# Altium PCB BURPG_accelerometer_v1.PcbDoc
Units mil, origin at the board's own origin, x right, y up, seen from the top; angles counter-clockwise.
Board outline 800 x 750 mil, 2 copper layers (Top Layer, Bottom Layer); 9 components, 8 nets, 39 pads, 7 vias.
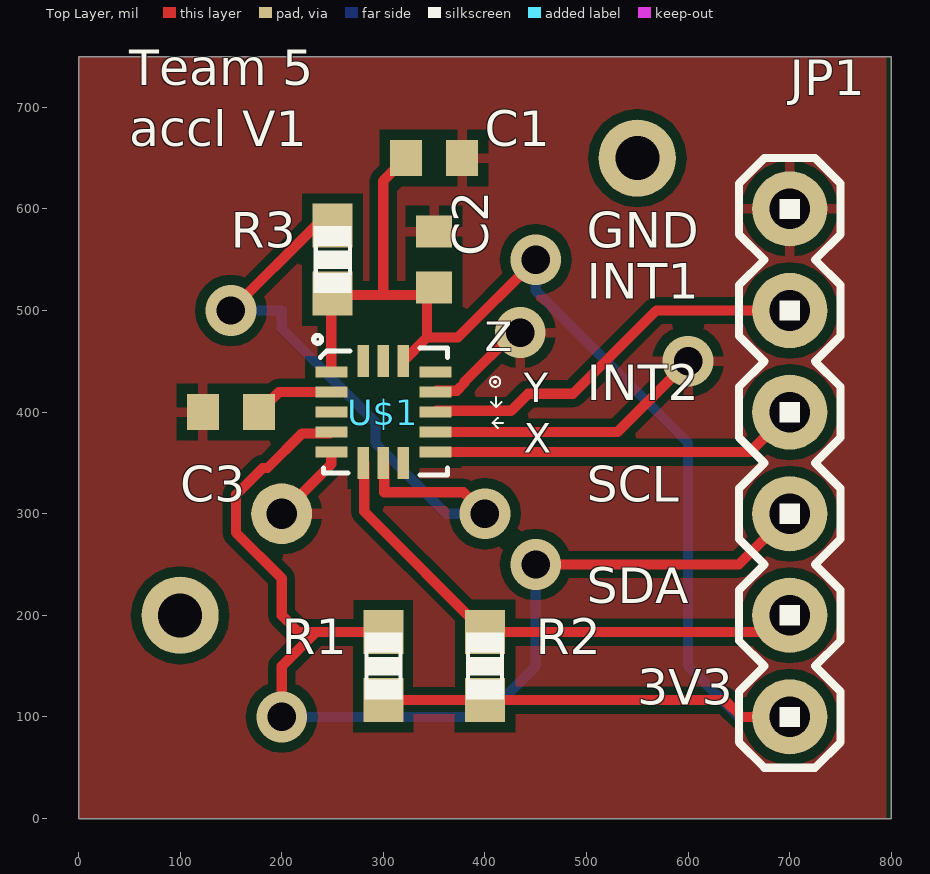
[diagram p0: Top Layer view]
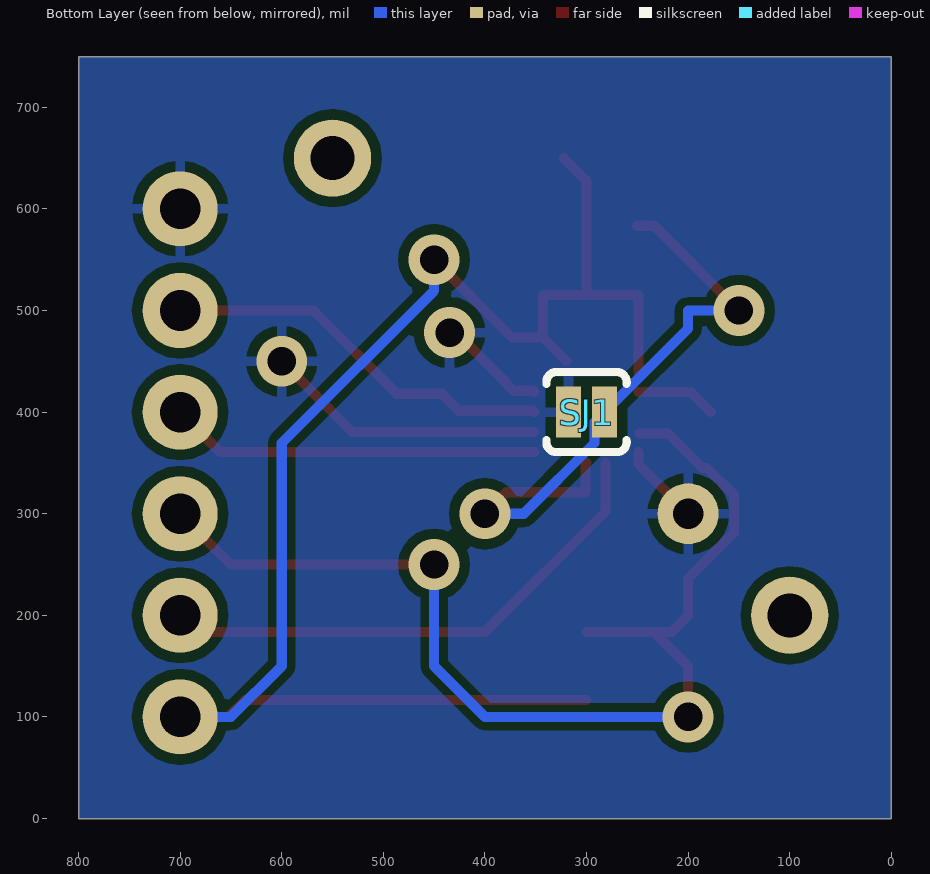
[diagram p1: Bottom Layer view, seen from below]

## Layer stack, top to bottom
Top Solder: solder mask 0.4, Solder Resist, Dk 3.5
Top Layer: signal copper 1.4
Dielectric 1: dielectric 12.6, FR-4, Dk 4.8
Bottom Layer: signal copper 1.4
Bottom Solder: solder mask 0.4, Solder Resist, Dk 3.5

## Board outline
0,0 0,750 800,750 800,0

## Design rules (kind name [scope] priority, off if disabled: settings)
Clearance [All] p1: gap=10 except(8: Track-Track Track-SMDPad Track-Poly SMDPad-SMDPad)
MinimumSolderMaskSliver [All] p1 off: minsoldermaskwidth=10
PolygonConnect [All] p1: connectstyle=Relief reliefconductorwidth=10 reliefentries=4 polygonreliefangle="90 Angle" airgapwidth=10
RoomDefinition BURPG_accelerometer_v1 [InComponentClass('BURPG_accelerometer_v1')] p1: confinementstyle=ConfineIn formatcopy=TRUE lockcomponents=FALSE outline 15,0 795,0 795,750 15,750
RoutingVias [All] p1: holewidth=28 width=50 viastyle="Through Hole" minholewidth=28 minwidth=50 maxholewidth=28 maxwidth=50
SilkToSilkClearance [All] p1 off: silktosilkclearance=10
SilkToSolderMaskClearance [IsPad] p1 off: minsilkscreentomaskgap=10 clearancetoexposedcopper=TRUE
SolderMaskExpansion [All] p1: expansion=4
Width [All] p1: maxlimit=10 minlimit=10 preferedwidth=10
27 further rules are at their usual default settings.

## Components (designator, comment, footprint, x,y, rotation, side; value= is the part's Value field where it differs from the comment)
C1 "Cap Semi" 1608[0603] 350,650 r180 top
C2 "Cap Semi" 1608[0603] 350,550 r270 top
C3 "Cap Semi" 1608[0603] 150,400 r0 top
JP1 "M06SIP" 1X06 700,100 r90 top
R1 "*" 0603-RES 300,150 r270 top
R2 "10k" 0603-RES 400,150 r270 top
R3 "10k" 0603-RES 250,550 r270 top
SJ1 "SOLDERJUMPERNO" SJ_2S-NO 300,400 r180 bottom
U$1 "ZEDIT_MMA8452Q" ZEDIT_MMASENSOR 300,400 r0 top

## Footprints (in the part's own frame and the unit in brackets; to place one, negate y for a bottom-side part, rotate by r counter-clockwise, add the part's x,y. Pads: shape width x height; smd on the part's side, far side on the other; paste and mask are expansions set on the pad)
1X06 [mil]
  round 74 hole 40: 1(0,0) 2(100,0) 3(200,0) 4(300,0) 5(400,0) 6(500,0)
  silkscreen extent -50,-50 550,50
0603-RES [mm]
  rect 1.1x1 smd: 1(-0.85,0) 2(0.85,0)
  silkscreen extent -0.84,-0.47 0.83,0.48
1608[0603] [mm] "Chip Capacitor, Body 1.6x0.8mm, IPC High Density"
  rect 0.8x0.9 smd: 1(-0.7,0) 2(0.7,0)
  body extent -0.87,-0.48 0.87,0.48, height 1.3
SJ_2S-NO [mm]
  rect 0.635x1.27 smd: 1(-0.45,0) 2(0.45,0)
  silkscreen extent -1,-1 1,1
ZEDIT_MMASENSOR [mm]
  rect 0.8x0.275 smd: 1(-1.3,1) 2(-1.3,0.5) 3(-1.3,0) 4(-1.3,-0.5) 5(-1.3,-1) 9(1.3,-1) 10(1.3,-0.5) 11(1.3,0) 12(1.3,0.5) 13(1.3,1)
  rect 0.29x0.8 smd: 6(-0.5,-1.275) 7(0,-1.275) 8(0.5,-1.275) 14(0.5,1.275) 15(0,1.275) 16(-0.5,1.275)
  silkscreen extent -1.74,-1.57 2.99,1.92

## Part data
C1 C2 C3: "Capacitor (Semiconductor SIM Model)"
R1 R2 R3: library part 10K-1%RES-00824

## Free pads (board coordinates)
  round 60 hole 30: 3(200,300)
  round 76 hole 43.42 mask+20: 4(100,200) 4(550,650)

## Via types
v1: diameter 50, hole 28, Top Layer to Bottom Layer, 7 vias

## Nets (pads, with @x,y where several pads share a name; then routed paths per layer and width w, separated by ;. In a path a pad name is that pad's centre, name@x,y a point inside that pad or via, vN(x,y) a via of type N, cw(c..) or ccw(c..) an arc to the next point about the centre after c; other vN are vias at no path point)
3.3V: C1.2 C2.2 JP1.1 R1.2 R2.2 R3.2 U$1.1 U$1.14 | length 1517.3
  Top Layer w10: U$1.1 248.8,515.34 300,515.34 ; R1.2 R2.2 636.05,116.54 652.59,100 JP1.1 ; U$1.14 342.9,473.41 ; C1.2 300,627.56 300,515.34 ; v1(450,550) 373.41,473.41 342.9,473.41 ; 300,515.34 342.9,515.34 342.9,473.41
  Bottom Layer w10: v1(450,550) 450,519.6 600,369.6 600,150 650,100 JP1.1
GND: C1.1 C2.1 C3.1 JP1.6 pad.3 SJ1.1 U$1.5 U$1.10 U$1.12 | length 467.2
  Top Layer w10: pad.3 248.8,348.8 U$1.5 ; U$1.10 530.32,380.32 v1(600,450) ; U$1.12 352.48,420.96 372.33,420.96 379.95,428.58 379.95,429.95 428.23,478.23 v1(434.8,478.23)
INT1: JP1.5 U$1.11 | length 390.2
  Top Layer w10: U$1.11 352.48,401.28 425.82,401.28 442.54,418 486.74,418 568.74,500 JP1.5
INT2: JP1.4 U$1.9 | length 365.1
  Top Layer w10: U$1.9 660.63,360.63 JP1.4
NetC3_2: C3.2 U$1.2 | length 79.4
  Top Layer w10: C3.2 197.24,419.68 U$1.2
NetR3_1: R3.1 SJ1.2 U$1.7 | length 627.2
  Top Layer w10: v1(150,500) 233.47,583.47 R3.1 ; U$1.7 300.98,349.8 300.98,321.06 378.94,321.06 v1(400,300)
  Bottom Layer w10: v1(150,500) 200,500 200,482.28 SJ1.2 292.22,390.07 292.22,369.62 361.83,300 v1(400,300)
SCL: JP1.3 R1.1 U$1.4 | length 1167
  Top Layer w10: v1(200,100) 200,150 233.47,183.47 R1.1 216.53,183.47 200,200 200,236.36 155,281.36 155,318.64 181.36,345 186.02,345 220.05,379.04 U$1.4@247.52,379.04 ; v1(450,250) 650,250 JP1.3
  Bottom Layer w10: v1(200,100) 400,100 450,150 v1(450,250)
SDA: JP1.2 R2.1 U$1.6 | length 522.5
  Top Layer w10: U$1.6@281.29,350 281.29,302.18 R2.1 683.47,183.47 JP1.2
pads on no net: U$1.3 U$1.8 U$1.13 U$1.15 U$1.16

## Polygon pours and split planes (outlines as drawn)
GND on Bottom Layer "Bottom_GND" (solid, pour order 6): 0,750 0,0 800,0 800,750
GND on Top Layer "Top_GND" (solid, pour order 8): 0,750 0,0 795,0 795,750

## Silkscreen, mask and mechanical layers (free items; w line width, h text height)
Top Overlay:
  text "Team 5 / accl V1" at 50,650 h60
  text "GND" at 500,550 h60
  text "INT1" at 500,500 h60
  text "INT2" at 500,400 h60
  text "Z  /    Y /    X" at 400,350 h50
  text "SCL" at 500,300 h60
  text "SDA" at 500,200 h60
  text "3V3" at 550,100 h60
Mechanical 1:
  the board outline again, w10